# EAGLE board armBandShield (EAGLE 9.3.1)
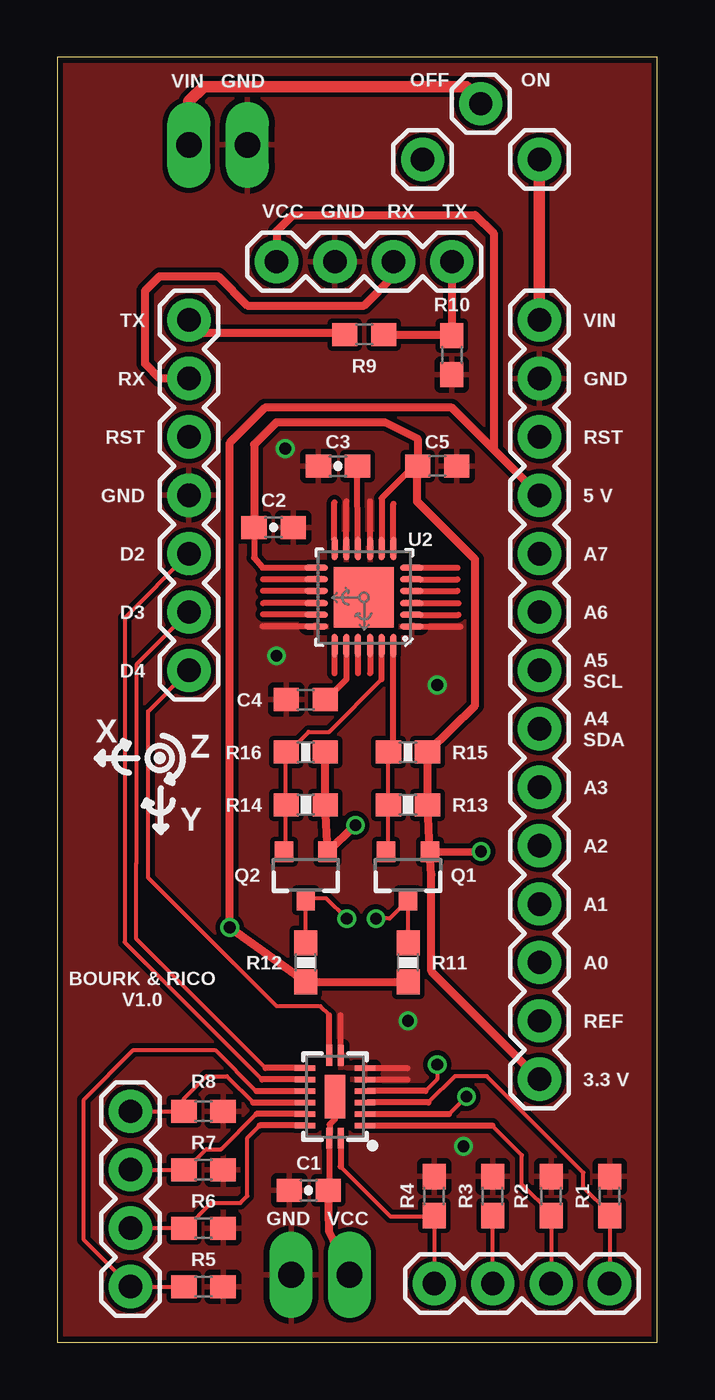
[diagram p0: board, top side]
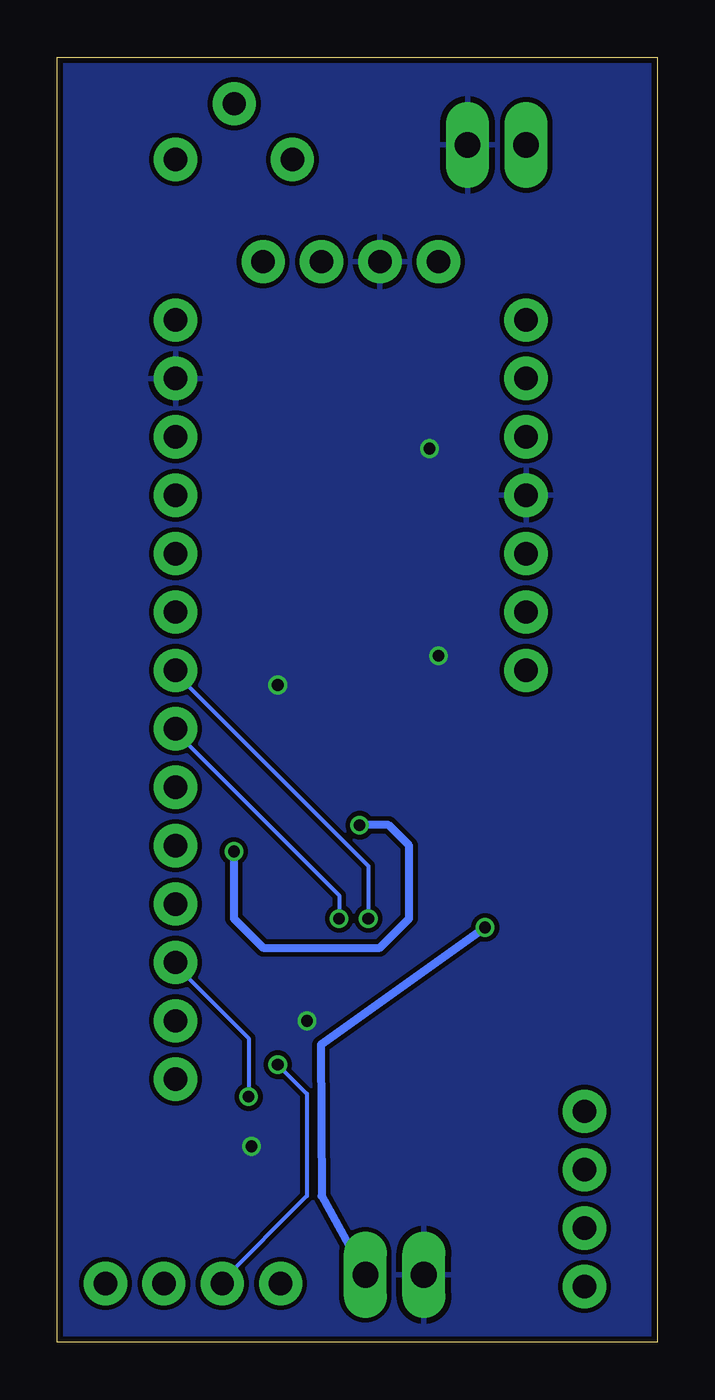
[diagram p1: board, bottom side, seen from below]

Size 26.09 x 55.87 mm. Coordinates in mm from the lower left corner, seen from the top.
Outline: 0,0 26.09,0 26.09,55.87 0,55.87 0,0
Copper layers (1*16): Top 0.035mm / dielectric 1.5mm / Bottom 0.035mm
Design rules "SeeedStudio_2layer_DRU_no_angle_20140221": minimum track width 6mil, minimum drill 12mil, track to track 6mil, track to pad 6mil, pad to pad 6mil, via to via 6mil, smd to smd 0mil, copper to edge 10mil, drill to drill 10mil, minimum pad ring 10mil, minimum via ring 6mil, stop-mask expansion 2mil, vias tented up to drill 100mil, thermal gap 10mil
Net classes: 0 default: width 0.178 mm, drill 0.508 mm, clearance 0.229 mm; 1 Pads: width 0.254 mm, clearance 0.203 mm; 2 PWR: width 0.356 mm, drill 0.508 mm, clearance 0.229 mm

## Footprints (pad centres in the part's own frame; a part is rotated, then mirrored left to right if it is on the bottom)
DHVQFN-16-2.5X3.5MM = smd 0.9 x 0.24: 1 -1.8,-0.25; 8 1.8,-0.25; 9 1.8,0.25; 16 -1.8,0.25 | smd 0.24 x 0.9: 2 -1.25,-1.3; 3 -0.75,-1.3; 4 -0.25,-1.3; 5 0.25,-1.3; 6 0.75,-1.3; 7 1.25,-1.3; 10 1.25,1.3; 11 0.75,1.3; 12 0.25,1.3; 13 -0.25,1.3; 14 -0.75,1.3; 15 -1.25,1.3 | smd 1.9 x 0.9: EP 0,0
1X04 = drill 1.016 pad 1.88: 1 0,0; 2 2.54,0; 3 5.08,0; 4 7.62,0
0603-CAP = smd 1.1 x 1: 1 -0.85,0; 2 0.85,0
0603 = smd 1.1 x 1: 1 -0.85,0; 2 0.85,0
1X01 = drill 1.016 pad 1.88: 1 0,0
1X07 = drill 1.016 pad 1.88: 1 0,0; 2 2.54,0; 3 5.08,0; 4 7.62,0; 5 10.16,0; 6 12.7,0; 7 15.24,0
SOT23-3 = smd 0.8 x 0.9: 1 -0.95,-1; 2 0.95,-1; 3 0,1.1
0603-RES = smd 1.1 x 1: 1 -0.85,0; 2 0.85,0
1X14 = drill 1.016 pad 1.88: 1 0,0; 2 2.54,0; 3 5.08,0; 4 7.62,0; 5 10.16,0; 6 12.7,0; 7 15.24,0; 8 17.78,0; 9 20.32,0; 10 22.86,0; 11 25.4,0; 12 27.94,0; 13 30.48,0; 14 33.02,0
QFN-24-4MM2 = smd 1.016 x 0.254: 1 -2.066,1.257; 2 -2.066,0.75; 3 -2.066,0.247; 4 -2.066,-0.287; 5 -2.066,-0.792; 6 -2.066,-1.297; 13 2.086,-1.297; 14 2.086,-0.792; 15 2.086,-0.287; 16 2.086,0.247; 17 2.086,0.75; 18 2.086,1.257 | smd 0.254 x 1.016: 7 -1.267,-2.122; 8 -0.762,-2.122; 9 -0.258,-2.122; 10 0.278,-2.122; 11 0.78,-2.122; 12 1.287,-2.122; 19 1.287,2.082; 20 0.78,2.082; 21 0.278,2.082; 22 -0.258,2.082; 23 -0.762,2.082; 24 -1.267,2.082 | smd 2.616 x 2.616: P$1 0.02,-0.01
1X02_LONGPADS = drill 1.118 pad 1.88 long: 1 0,0; 2 2.54,0

## Placement (x,y rotation side)
74HC4051  U1  [DHVQFN-16-2.5X3.5MM]  12.06,10.67 90 top
BT_HEADERS  J5  [1X04]  9.53,46.99 0 top
C1  0.1uF  [0603-CAP]  10.92,6.6 180 top
C2  0.1uF  [0603-CAP]  9.4,35.43 0 top
C3  0.1uF  [0603-CAP]  12.19,38.1 180 top
C4  2.2nF  [0603]  10.79,27.94 180 top
C5  10nF  [0603]  16.51,38.1 0 top
J1  FSR_HEADERS_1  [1X04]  3.17,2.41 90 top
J2  FSR_HEADERS_2  [1X04]  24,2.54 180 top
J8  [1X01]  15.88,51.44 0 top
J9  [1X01]  18.4,53.86 0 top
J10  [1X01]  20.95,51.44 0 top
LEFT_HEADER  J3  [1X07]  5.71,44.45 270 top
Q1  BSS138  [SOT23-3]  15.24,20.32 180 top
Q2  BSS138  [SOT23-3]  10.79,20.32 180 top
R1  5.1k  [0603]  24,6.35 90 top
R2  5.1k  [0603]  21.46,6.35 90 top
R3  5.1k  [0603]  18.92,6.35 90 top
R4  5.1k  [0603]  16.38,6.35 90 top
R5  5.1k  [0603]  6.35,2.41 0 top
R6  5.1k  [0603]  6.35,4.95 0 top
R7  5.1k  [0603]  6.35,7.49 0 top
R8  5.1k  [0603]  6.35,10.03 0 top
R9  1k  [0603]  13.34,43.81 0 top
R10  2.0k  [0603]  17.14,42.93 270 top
R11  10K  [0603-RES]  15.24,16.51 90 top
R12  10K  [0603-RES]  10.79,16.51 90 top
R13  10K  [0603-RES]  15.24,23.37 180 top
R14  10K  [0603-RES]  10.79,23.37 180 top
R15  10K  [0603-RES]  15.24,25.65 180 top
R16  10K  [0603-RES]  10.79,25.65 180 top
RIGHT_HEADER  J4  [1X14]  20.95,11.43 90 top
U2  MPU-6050-1  [QFN-24-4MM2]  13.34,32.38 180 top
VCC_HEADERS  J6  [1X02_LONGPADS]  10.16,2.92 0 top
VIN_HEADERS  J7  [1X02_LONGPADS]  5.71,52.07 0 top

## Library data of the parts
74HC4051 = SparkFun-IC-Logic; PROD_ID: IC-13334
BT_HEADERS J1 J2 = SparkFun-Connectors; PROD_ID: CONN-09696
C1-C3 = SparkFun-Capacitors; PROD_ID: CAP-00810
C4 = SparkFun-Capacitors; PROD_ID: CAP-07877
C5 = SparkFun-Capacitors; PROD_ID: CAP-00867
J8-J10 LEFT_HEADER RIGHT_HEADER VCC_HEADERS VIN_HEADERS = SparkFun-Connectors
Q1 Q2 R11-R14 = SparkFun
R1-R8 = SparkFun-Resistors; PROD_ID: RES-12083
R9 = SparkFun-Resistors; PROD_ID: RES-07856
R10 = SparkFun-Resistors; PROD_ID: RES-08296
R15 R16 = SparkFun-Resistors; PROD_ID: RES-00824
U2 = Testing

## Nets
A0: 74HC4051.3 RIGHT_HEADER.3
A4/SDA/HIGH: Q1.3 R11.2 RIGHT_HEADER.7
A4/SDA/LOW: Q1.2 R13.2 R15.2 U2.24
A5/SCL/HIGH: Q2.3 R12.2 RIGHT_HEADER.8
A5/SCL/LOW: Q2.2 R14.2 R16.2 U2.23
D2: 74HC4051.11 LEFT_HEADER.5
D3: 74HC4051.10 LEFT_HEADER.6
D4: 74HC4051.9 LEFT_HEADER.7
FSR1: 74HC4051.4 J2.1 R1.1
FSR2: 74HC4051.2 J2.2 R2.1
FSR3: 74HC4051.5 J2.3 R3.1
FSR4: 74HC4051.1 J2.4 R4.1
FSR5: 74HC4051.12 J1.1 R5.1
FSR6: 74HC4051.15 J1.2 R6.1
FSR7: 74HC4051.14 J1.3 R7.1
FSR8: 74HC4051.13 J1.4 R8.1
GND [Pads]: 74HC4051.6 74HC4051.7 74HC4051.8 BT_HEADERS.2 C1.2 C2.2 C3.2 C4.2 C5.2 LEFT_HEADER.4 R1.2 R2.2 R3.2 R4.2 R5.2 R6.2 R7.2 R8.2 R10.2 RIGHT_HEADER.13 U2.1 U2.9 U2.11 U2.18 VCC_HEADERS.1 VIN_HEADERS.2
N$1: J9.1 VIN_HEADERS.1
N$3: C4.1 U2.20
N$5: C3.1 U2.10
N$7: BT_HEADERS.4 R9.2 R10.1
RX: BT_HEADERS.3 LEFT_HEADER.2
TX: LEFT_HEADER.1 R9.1
VCC: 74HC4051.16 74HC4051.EP BT_HEADERS.1 C1.1 R11.1 R12.1 RIGHT_HEADER.11 VCC_HEADERS.2
VCC_2: C2.1 C5.1 Q1.1 Q2.1 R13.1 R14.1 R15.1 R16.1 RIGHT_HEADER.1 U2.8 U2.13
VIN: J10.1 RIGHT_HEADER.14

## Tracks (layer width: path | path; a pad name or v marks a point on that pad's centre or on a via)
A0  (via drill 0.51)
  Top 0.178: v17.78,10.67 17.02,9.91 | 13.46,9.91 74HC4051.3
  Top 0.254: 17.02,9.91 13.46,9.91
  Bottom 0.178: v17.78,10.67 17.78,13.21 20.95,16.38 RIGHT_HEADER.3
A4/SDA/HIGH  (via drill 0.51)
  Top 0.178: R11.2 Q1.3 14.44,18.41 v13.84,18.41
  Bottom 0.178: v13.84,18.41 13.84,19.43 20.95,26.54 RIGHT_HEADER.7
A4/SDA/LOW
  Top 0.178: 14.35,23.37 14.35,21.34 Q1.2 | 14.61,25.78 14.48,25.65 R15.2 14.35,25.65 14.35,23.37 | 14.61,30.23 U2.24 | 14.35,23.37 R13.2
  Top 0.254: 14.61,25.78 14.61,30.23
A5/SCL/HIGH  (via drill 0.51)
  Top 0.178: R12.2 Q2.3 10.79,19.3 11.68,19.3 v12.57,18.41
  Bottom 0.178: v12.57,18.41 12.57,20.7 20.95,29.08 RIGHT_HEADER.8
A5/SCL/LOW
  Top 0.178: 9.91,23.37 9.91,21.34 Q2.2 | 14.1,28.83 11.81,26.54 10.92,26.54 10.03,25.65 R16.2 9.91,25.65 9.91,23.37 | 14.1,30.23 U2.23 | 9.91,23.37 R14.2
  Top 0.254: 14.1,28.83 14.1,30.23
D2
  Top 0.178: 8.89,11.42 2.92,17.39 2.92,31.5 LEFT_HEADER.5
  Top 0.254: 74HC4051.11 8.89,11.42
D3
  Top 0.178: LEFT_HEADER.6 3.43,29.46 3.43,20.95 3.43,20.83 3.43,17.53 9.04,11.92
  Top 0.254: 74HC4051.10 9.04,11.92
D4
  Top 0.178: LEFT_HEADER.7 3.94,27.43 3.94,20.19 9.53,14.61 11.43,14.61 11.81,14.22
  Top 0.254: 74HC4051.9 11.81,14.22
FSR1
  Top 0.178: 16.13,10.41 17.27,11.56 18.67,11.56 22.86,7.37 22.86,6.73 24,5.59 R1.1 J2.1 | 13.46,10.41 74HC4051.4
  Top 0.254: 16.13,10.41 13.46,10.41
FSR2
  Top 0.178: 18.91,9.41 20.19,8.13 20.19,6.86 21.46,5.59 R2.1 J2.2 | 13.4,9.41 74HC4051.2
  Top 0.254: 18.91,9.41 13.4,9.41
FSR3  (via drill 0.51)
  Top 0.178: v16.51,12.06 16.51,11.43 16,10.92 | 13.46,10.92 74HC4051.5 | J2.3 R3.1
  Top 0.254: 16,10.92 13.46,10.92
  Bottom 0.178: v16.51,12.06 15.24,10.79 15.24,6.35 18.92,2.67 J2.3
FSR4
  Top 0.178: J2.4 R4.1 16.34,5.46 14.48,5.46 12.31,7.62
  Top 0.254: 74HC4051.1 12.31,7.62
FSR5
  Top 0.178: 8.65,10.91 6.86,12.7 3.3,12.7 1.14,10.54 1.14,4.45 J1.1 R5.1
  Top 0.254: 74HC4051.12 8.65,10.91
FSR6
  Top 0.178: J1.2 R6.1 5.59,4.95 6.68,6.04 7.95,6.04 8.26,6.35 8.26,8.89 8.78,9.42
  Top 0.254: 74HC4051.15 8.78,9.42
FSR7
  Top 0.178: 8.65,9.92 7.11,8.38 6.48,8.38 5.59,7.49 R7.1 J1.3
  Top 0.254: 74HC4051.14 8.65,9.92
FSR8
  Top 0.178: 8.51,10.41 7.37,11.56 6.48,11.56 5.5,10.58 R8.1 J1.4 | 10.67,10.41 74HC4051.13
  Top 0.254: 8.51,10.41 10.67,10.41
GND  (via drill 0.51)
  Top 0.254: 74HC4051.8 12.31,14.22 | 74HC4051.7 15.22,11.92 | 74HC4051.6 15.23,11.42 | U2.9 13.59,36.57 | U2.11 12.55,36.56 | U2.18 8.91,31.13 | U2.1 17.53,31.11
  other vias: 9.91,38.86 9.53,29.84 16.51,28.57 17.65,8.51 15.24,13.97
  pour Top: -1.27,57.15 -1.27,-1.27 27.3,-1.27 27.3,57.15
  pour Bottom: -1.91,57.78 -1.91,-1.91 28.57,-1.91 28.57,57.78
N$1
  Top 0.178: J9.1 18.4,53.98
  Top 0.508: VIN_HEADERS.1 5.71,53.97 6.35,54.6 17.78,54.6 18.4,53.98
N$3
  Top 0.178: 12.57,30.23 U2.20 | 11.68,27.94 C4.1
  Top 0.254: 12.57,30.23 12.57,28.83 11.68,27.94
N$4
  Top 0.254: 10.85,33.17 8.94,33.17
N$5
  Top 0.254: U2.10 C3.1
N$6
  Top 0.254: 10.85,32.66 8.94,32.66
N$7
  Top 0.178: R10.1 17.12,43.8 | 14.21,43.8 R9.2
  Top 0.356: 17.12,43.8 14.21,43.8 | BT_HEADERS.4 R10.1
N$8
  Top 0.254: 10.85,32.13 8.94,32.13
N$9
  Top 0.254: 10.85,31.65 8.94,31.65
N$10
  Top 0.254: 12.04,29.97 12.04,29.08
N$11
  Top 0.254: 13.06,29.97 13.06,29.08
N$12
  Top 0.254: 13.59,29.97 13.59,29.08
N$13
  Top 0.254: 15.77,31.62 17.42,31.62
N$14
  Top 0.254: 15.75,32.66 17.4,32.66
N$15
  Top 0.254: 15.75,33.17 17.4,33.17
N$16
  Top 0.254: 15.75,33.68 17.4,33.68
N$17
  Top 0.254: 15.77,32.13 17.42,32.13
N$18
  Top 0.254: 14.61,34.92 14.61,36.45
N$19
  Top 0.254: 12.04,34.87 12.04,36.52
RX
  Top 0.356: LEFT_HEADER.2 4.45,41.91 3.81,42.55 3.81,45.72 4.45,46.35 6.99,46.35 8.26,45.09 13.34,45.09 14.61,46.35 BT_HEADERS.3
TX
  Top 0.178: R9.1 12.42,43.88 | 5.71,44.39 LEFT_HEADER.1
  Top 0.356: 12.42,43.88 6.22,43.88 5.71,44.39
VCC  (via drill 0.51)
  Top 0.254: C1.1 11.81,6.65 74HC4051.16 11.83,8.88 11.83,9.46 12.06,9.69 74HC4051.EP
  Top 0.356: BT_HEADERS.1 9.53,48.32 10.22,49.02 18.16,49.02 18.99,48.2 18.99,38.8 | RIGHT_HEADER.11 18.99,38.8 | 18.99,38.8 17.14,40.64 9.02,40.64 7.49,39.12 v7.49,18.03 R12.1 R11.1 | VCC_HEADERS.2 11.81,4.83 C1.1
  Bottom 0.356: v7.49,18.03 14.63,12.93 14.61,6.35 VCC_HEADERS.2
VCC_2  (via drill 0.51)
  Top 0.254: C5.1 15.49,38.1 14.1,36.7 U2.8 | U2.13 8.92,33.68 8.55,34.12 C2.1
  Top 0.356: RIGHT_HEADER.1 16.26,16.13 16.26,20.32 Q1.1 | C2.1 8.55,39.03 9.53,40.01 14.22,40.01 15.66,39.29 C5.1 15.62,38.06 15.62,36.58 18.16,34.04 18.16,27.69 R15.1 R13.1 Q1.1 | v12.95,22.48 Q2.1 R14.1 R16.1 | Q1.1 v18.41,21.34
  Bottom 0.356: v18.41,21.34 18.41,18.41 17.14,17.14 12.06,17.14 10.79,18.41 10.79,21.59 11.68,22.48 v12.95,22.48
VIN
  Top 0.508: RIGHT_HEADER.14 J10.1

## Text on the board
tPlace: X | Z | Y
tNames: VIN GND | OFF ON | VCC GND RX TX | TX | VIN | RX | GND | RST | RST | GND | 5 V | U2 | D2 | A7 | D3 | A6 | D4 | A5 / SCL | A4 / SDA | A3 | A2 | A1 | A0 | BOURK & RICO / V1.0 | REF | 3.3 V | GND VCC